# Altium PCB Moto Power Supply 4x12v 4x5v (v2.0).PcbDoc
Units mm, origin at the board's own origin, x right, y up, seen from the top; angles counter-clockwise.
Board outline 66.99 x 39 mm, 2 copper layers (Top Layer, Bottom Layer); 15 components, 14 nets, 52 pads, 6 vias.
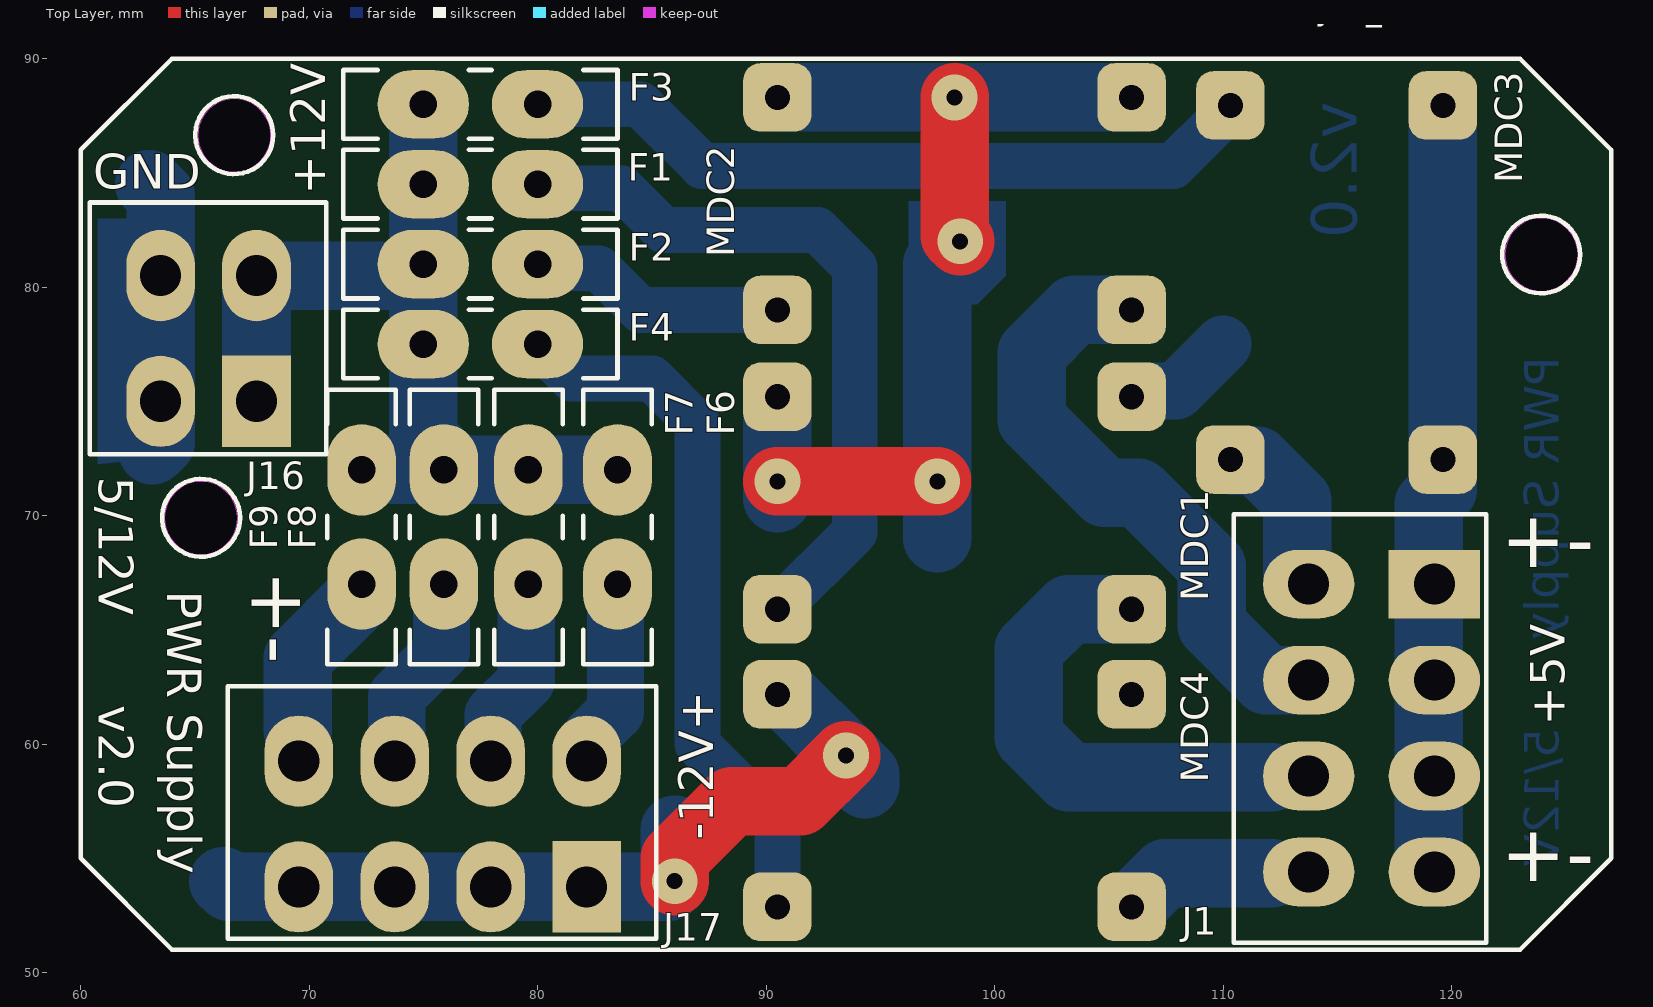
[diagram p0: Top Layer view]
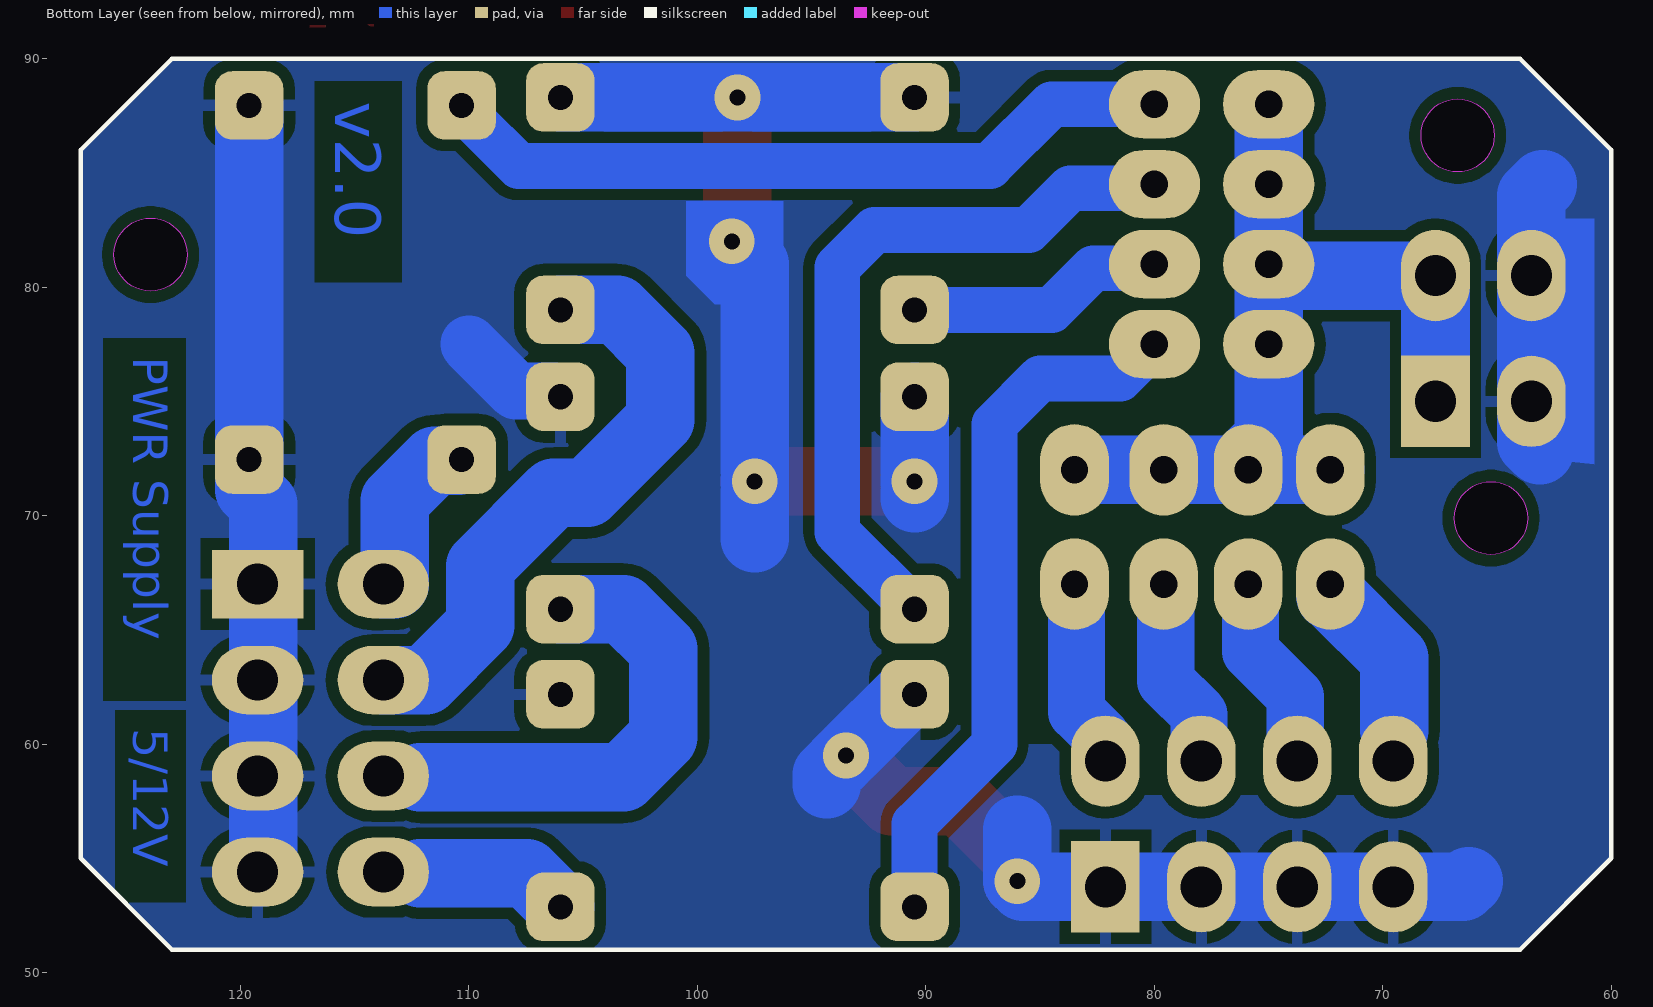
[diagram p1: Bottom Layer view, seen from below]

## Layer stack, top to bottom
Top Solder: solder mask 0.0102, Solder Resist, Dk 3.5
Top Layer: signal copper 0.0356
Dielectric 1: dielectric 0.32, FR-4, Dk 4.8
Bottom Layer: signal copper 0.0356
Bottom Solder: solder mask 0.0102, Solder Resist, Dk 3.5

## Board outline
60.006,55 60.006,86 60.006,86.006 64,90 123,89.998 123,90 127,86 127,55 123,51 64,51
cut-out: 122.338,81.422 ccw(c123.938,81.422) 123.938,79.822 ccw(c123.938,81.422) 125.538,81.422 ccw(c123.938,81.422) 123.938,83.022 ccw(c123.938,81.422)
cut-out: 65.128,86.638 ccw(c66.728,86.638) 66.728,85.038 ccw(c66.728,86.638) 68.328,86.638 ccw(c66.728,86.638) 66.728,88.238 ccw(c66.728,86.638)
cut-out: 63.672,69.888 ccw(c65.272,69.888) 65.272,68.288 ccw(c65.272,69.888) 66.872,69.888 ccw(c65.272,69.888) 65.272,71.488 ccw(c65.272,69.888)

## Design rules (kind name [scope] priority, off if disabled: settings)
Clearance [All] p1: gap=0.5 ignorepadtopadclearanceinfootprint=FALSE
ComponentClearance [All] p1: gap=0.01 collisioncheckmode=3 verticalgap=0.2 showdistances=FALSE
Height [All] p1: minheight=0 maxheight=25 prefheight=12.7
HoleSize [All] p1: absolutevalues=TRUE maxlimit=3.2 minlimit=0.4 maxpercent=80.000 minpercent=20.000
HoleToHoleClearance [All] p1: gap=0.2 allowstackedmicrovias=TRUE
PlaneClearance [All] p1: clearance=1
PlaneConnect [All] p1: planeconnectstyle=Relief reliefexpansion=0.508 reliefentries=4 reliefconductorwidth=0.5 reliefairgap=0.5
PolygonConnect [All] p1: connectstyle=Relief reliefconductorwidth=0.5 reliefentries=4 polygonreliefangle="90 Angle" airgapwidth=0.5
RoutingVias [All] p1: holewidth=0.7 width=1.5 viastyle="Through Hole" minholewidth=0.4 minwidth=0.4 maxholewidth=3.2 maxwidth=7
SilkToSilkClearance [All] p1: silktosilkclearance=0.05
SilkToSolderMaskClearance [IsPad] p1: minsilkscreentomaskgap=0.2 clearancetoexposedcopper=TRUE
SolderMaskExpansion [All] p1: expansion=0.1 istentingtop=FALSE
Width [All] p1: maxlimit=3 minlimit=0.2 preferedwidth=0.5
22 further rules are at their usual default settings.

## Components (designator, comment, footprint, x,y, rotation, side; value= is the part's Value field where it differs from the comment)
F1 "3A" "Fuse MF-R300 (3A)" 80,84.5 r270 top
F2 "3A" "Fuse MF-R300 (3A)" 80,81 r270 top
F3 "3A" "Fuse MF-R300 (3A)" 80,88 r270 top
F4 "3A" "Fuse MF-R300 (3A)" 80,77.5 r270 top
F6 "3A" "Fuse MF-R300 (3A)" 83.5,67 r180 top
F7 "3 A" "Fuse MF-R300 (3A)" 79.6,67 r180 top
F8 "3 A" "Fuse MF-R300 (3A)" 75.9,67 r180 top
F9 "3 A" "Fuse MF-R300 (3A)" 72.3,67 r180 top
J1 "connector" "Molex Mini-Fit Jr - 8Pin V" 119.25,58.6 r180 top
J16 "connector" "Molex Mini-Fit Jr - 4Pin V" 63.5,75 r90 top
J17 "connector" "Molex Mini-Fit Jr - 8Pin V" 73.75,53.75 r90 top
MDC1 "DC-DC" "DC-DC_MP1584N (SMALL)" 90.5,65.9 r0 top
MDC2 "DC-DC" "DC-DC_MP1584N (SMALL)" 90.5,79 r0 top
MDC3 "DC-DC" "DC-DC_MP1584N (SMALL)" 110.325,87.95 r270 top
MDC4 "DC-DC" "DC-DC_MP1584N (SMALL)" 90.5,52.875 r0 top

## Footprints (in the part's own frame and the unit in brackets; to place one, negate y for a bottom-side part, rotate by r counter-clockwise, add the part's x,y. Pads: shape width x height; smd on the part's side, far side on the other; paste and mask are expansions set on the pad)
"DC-DC_MP1584N (SMALL)" [mm]
  rrect50% 3x3 hole 1.1: GND(0,9.3) GND(15.5,9.3) IN(0,0) Out(15.5,0)
  body extent -1.27,-1.27 16.8,10.6, height 6.7
"Fuse MF-R300 (3A)" [mm] "Resettable 11A"
  oval 3x4 hole 1.2: 1(0,0) 2(0,-5)
  silkscreen extent -1.5,-8.5 1.5,3.5, body extent -1.53,-6.19 1.43,1.39, height 15
"Molex Mini-Fit Jr - 4Pin V" [mm] "Molex Mega-Fit"
  rect 4x3 hole 1.8: 1(0,-4.2)
  oval 4x3 hole 1.8: 2(0,0) 3(5.5,-4.2) 4(5.5,0)
  silkscreen extent -2.32,-7.25 8.7,3.1, body extent -2.27,-7.27 8.73,3.12, height 12.8
"Molex Mini-Fit Jr - 8Pin V" [mm] "Molex Mega-Fit"
  rect 4x3 hole 1.8: 1(0,-8.4)
  oval 4x3 hole 1.8: 2(0,-4.2) 3(0,0) 4(0,4.2) 5(5.5,-8.4) 6(5.5,-4.2) 7(5.5,0) 8(5.5,4.2)
  silkscreen extent -2.27,-11.45 8.77,7.3, body extent -2.27,-11.5 8.73,7.3, height 12.8

## Part data
F1 F2 F3 F4 F6 F7 F8 F9: library part Fuse, "Round fuse"
J1 J17: library part "Molex Mini-Fit Jr - 8 pin", "Right, Dbl line, Female"
J16: library part "Molex Mini-Fit Jr - 4 pin", "Right, Dbl line, Female"
MDC1 MDC2 MDC3 MDC4: library part "DC-DC MP1584N", "DC-DC StepDown"

## Via types
v1: diameter 2, hole 0.7, Top Layer to Bottom Layer, 6 vias

## Nets (pads, with @x,y where several pads share a name; then routed paths per layer and width w, separated by ;. In a path a pad name is that pad's centre, name@x,y a point inside that pad or via, vN(x,y) a via of type N, cw(c..) or ccw(c..) an arc to the next point about the centre after c; other vN are vias at no path point)
"+5V #1": J1.7 MDC1.Out | length 20.4
  Bottom Layer w3: MDC1.Out 103.257,65.9 101.5,64.143 101.5,60.307 103.257,58.55 J1.7@112.125,58.55
"+5V #2": J1.6 MDC2.Out | length 26.4
  Bottom Layer w3: MDC2.Out 103.507,79 101.621,77.114 101.621,74.19 104.822,70.989 106.3,70.989 109.5,67.789 109.5,65.2 111.9,62.8 J1.6
"+5V #3": J1.5 MDC3.Out | length 7.6
  Bottom Layer w3: MDC3.Out@110.475,72.4 111.493,72.4 113.25,70.643 113.25,67 J1.5
"+5V #4": J1.8 MDC4.Out | length 6.7
  Bottom Layer w3: MDC4.Out 107.475,54.35 J1.8@112.125,54.35
"+12V No Noise": F1.2 F2.2 F3.2 F4.2 F6.2 F7.2 F8.2 F9.2 J16.1 J16.3 | length 40.6
  Bottom Layer w3: J16.1 J16.3 74,80.5 74.5,81 F2.2 ; F9.2 F8.2 ; F3.2 F1.2 F2.2 ; F6.2 F8.2 ; F2.2 F4.2 75,73.4 75.9,72.5 F8.2
GND: J1.1 J1.2 J1.3 J1.4 J16.2 J16.4 J17.1 J17.2 J17.3 J17.4 MDC1.GND MDC2.GND MDC3.GND MDC4.GND | length 136.1
  Top Layer w3: v1(86,54) 86,55 88.5,57.5 91.5,57.5 v1(93.5,59.5) ; v1(90.5,71.5) v1(97.5,71.5) ; v1(98.25,88.3) 98.25,82.25 v1(98.5,82)
  Bottom Layer w2.5: MDC1.GND@106,75.2 106.25,75.45 107.95,75.45 110,77.5
  Bottom Layer w3: 63,84.5 63.5,84 J16.4 J16.2 63.5,73.207 63.146,72.854 ; 66.25,54 66.5,53.75 J17.4 J17.3 J17.2 J17.1 85.75,53.75 v1(86,54) 86,56.25 ; MDC4.GND@90.5,62.175 90.825,62.175 v1(93.5,59.5) 94.337,58.663 94.337,58.247 ; v1@90.5,70.75 v1(90.5,71.5) MDC1.GND@90.5,75.2 ; MDC2.GND@90.5,88.3 v1(98.25,88.3) MDC2.GND@106,88.3 ; 97.5,69 v1(97.5,71.5) 97.5,81 v1(98.5,82) ; J1.4 119,54.4 119,62.8 119,70.5 119.625,71.125 119.625,72.45 MDC3.GND@119.625,87.95
NetF1_1: F1.1 MDC1.IN | length 31.8
  Bottom Layer w2: F1.1 80.182,84.318 83.682,84.318 85.5,82.5 92.25,82.5 93.879,80.871 93.879,69.279 MDC1.IN
NetF2_1: F2.1 MDC2.IN | length 11.3
  Bottom Layer w2: F2.1 80.182,80.818 82.682,80.818 84.5,79 MDC2.IN
NetF3_1: F3.1 MDC3.IN | length 32.6
  Bottom Layer w2: F3.1 84.5,88 87.2,85.3 107.828,85.3 109.825,87.297 109.825,87.45 MDC3.IN
NetF4_1: F4.1 MDC4.IN | length 31
  Bottom Layer w2: F4.1 81.5,76 85,76 87,74 87,60 90.5,56.5 MDC4.IN
NetF6_1: F6.1 J17.5 | length 7.8
  Bottom Layer w2.5: J17.5@82.037,59.963 82.228,59.963 82.246,59.981 82.246,60.246 83.404,61.404 83.404,66.904 F6.1
NetF7_1: F7.1 J17.6 | length 7.9
  Bottom Layer w2.5: J17.6@77.837,59.963 78.028,59.963 78.046,59.981 78.046,61.296 79.504,62.754 79.504,66.904 F7.1
NetF8_1: F8.1 J17.7 | length 8.1
  Bottom Layer w2.5: J17.7@73.637,59.963 73.82,59.963 73.837,59.981 73.837,62.087 75.804,64.054 75.804,66.904 F8.1
NetF9_1: F9.1 J17.8 | length 7.6
  Bottom Layer w3: J17.8@69.5,60.6 69.5,63.75 72.25,66.5 72.3,66.5 F9.1

## Polygon pours and split planes (outlines as drawn)
GND on Bottom Layer "GND_L02_P006" (solid, pour order 6): 64,51 123,51 127,55 127,86 123,90 64,90 60,86 60,55
no net on Bottom Layer "NONET_L02_P000" (solid, pour order 0): 65,52

## Other copper
Top Layer:
  text ".Layer_Name" at 111.975,91.7 h1
Bottom Layer:
  region net GND: 63.25,72.515 63.25,82.5 62.75,83 60.75,83 60.75,72.25
  region net GND: 96.25,83.75 100.5,83.75 100.5,80.5 99.25,79.25 97.25,79.25 96.25,80.25
  pour cut-out: 69.55,59.25 69.75,59.45 69.75,65 70.55,65 72.3,66.75 72.55,66.5 85.5,66.5 85.5,60.007 85.493,60 83.5,60 83.5,59.25 82,57.75 69.25,57.75
  text ".Layer_Name" at 75,92 h1
  text "v2.0" at 115.85,88.1 h2 r90
  text "PWR Supply" at 124.7,76.95 h1.5 r90
  text "5/12V" at 124.7,60.7 h1.52 r90

## Silkscreen, mask and mechanical layers (free items; w line width, h text height)
Top Overlay:
  circle w0.2: c123.925,81.425 r1.706
  circle w0.2: c65.275,69.9 r1.706
  circle w0.2: c66.725,86.65 r1.706
  lines w0.2: 60.006,54.998 60.006,54.994 64,51 123,51 127,55 127,86 123,90 ; 60.006,55 60.006,86 60.006,86.006 64,90 123,89.998
  text ".Layer_Name" at 111.975,91.7 h1
  text "GND" at 60.55,84.3 h1.5
  text "+12V" at 70.7,84.05 h1.5 r90
  text "5/12V" at 60.8,71.7 h1.52 r270
  text "+-" at 122.15,67.733 h2.5
  text "+-" at 67.483,67.6 h2.5 r270
  text "PWR Supply" at 63.8,66.7 h1.5 r270
  text "v2.0" at 60.8,61.7 h1.5 r270
  text "+5V" at 124.95,60.8 h1.5 r90
  text "-12V+" at 87.7,55.8 h1.5 r90
  text "+-" at 122.15,53.983 h2.5
Bottom Overlay:
  lines w0.2: 60,55 64,51 123,51 127,55 127,86 123,90 64,90 60,86 60,55
  text ".Layer_Name" at 75,92 h1
Top Solder:
  text ".Layer_Name" at 111.975,91.7 h1
Bottom Solder:
  region: 116.25,88.5 116.25,80.75 113.5,80.75 113.5,88.5
  region: 125.5,62.25 125.5,77.25 123,77.25 123,77 123,62.25
  region: 122.75,53.5 125,53.5 125,61 122.75,61
  lines w2: 69.55,59.25 69.55,63.8 72.3,66.55 72.3,67 ; 73.75,59.25 73.75,62 75.9,64.15 75.9,67 ; 77.95,59.25 77.95,61.2 79.5,62.75 79.5,67.25 ; 80,77.5 81.5,76 85,76 87,74 87,60 90.5,56.5 90.5,52.875 ; 80,81 82.5,81 84.5,79 90.5,79 ; 80,84.5 83.5,84.5 85.5,82.5 92.25,82.5 93.875,80.875 93.875,69.275 90.5,65.9 ; 80,88 84.5,88 87.25,85.25 107.75,85.25 110.325,87.825 110.325,87.95 ; 82.15,59.25 82.15,60.15 83.5,61.5 83.5,67 ; 90.5,62.175 90.825,62.175 93.75,59.25 ; 93.5,59.5 97.5,63.5 97.5,81 98.5,82 ; 106,52.875 107.525,54.4 113.75,54.4 ; 106,65.9 103.4,65.9 101.5,64 101.5,60.25 103.15,58.6 113.75,58.6 ; 106,79 103.5,79 101.75,77.25 101.75,74 104.75,71 106.25,71 109.5,67.75 109.5,65.25 111.95,62.8 113.75,62.8 ; 110,72.5 111.5,72.5 113.25,70.75 113.25,68 113.75,67.5 113.75,67
  lines w2.5: 67.7,75 67.7,80.5 75,80.5 ; 74.5,72 75,72.5 75,88 ; 83.5,72 72.3,72 ; 97.75,81.75 98.5,82.5 108,82.5 112.5,78 116.25,78 119.25,75 119.25,54.4 ; 72.3,72 72.3,72
  lines w3: 61.75,81 61.75,59.25 67,54 86,54
  text ".Layer_Name" at 75,92 h1
Mechanical 2:
  text "67 x 39 mm" at 61,95.25 h1
  text "T O P" at 113.55,93.6 h2.7
  text "G1015 / G1017 Masterkit Case" at 60.975,93.475 h1
  text ".Pcb_File_Name_No_Path" at 60.925,91.425 h1
Mechanical 3:
  text "67 x 39 mm" at 127,95.25 h1
  text "T O P" at 74.15,93.6 h2.7
  text "G1015 / G1017 Masterkit Case" at 126.975,93.475 h1
  text ".Pcb_File_Name_No_Path" at 126.925,91.425 h1

## Dimensions
60,51 to 127,51 on Mechanical 3
60,90 to 60,51 on Mechanical 3
60,90 to 60,51 on Mechanical 2
60,51 to 127,51 on Mechanical 2